# Altium PCB PCB1.PcbDoc (part 3 of 3)
Units mm, origin at the board's own origin, x right, y up, seen from the top; angles counter-clockwise.
Board outline 76.07 x 51.31 mm, 2 copper layers (Top Layer, Bottom Layer), stack 0.771 mm thick; 93 components, 68 nets, 330 pads, 277 vias.
Unrouted connection lines stored in the file: 4.
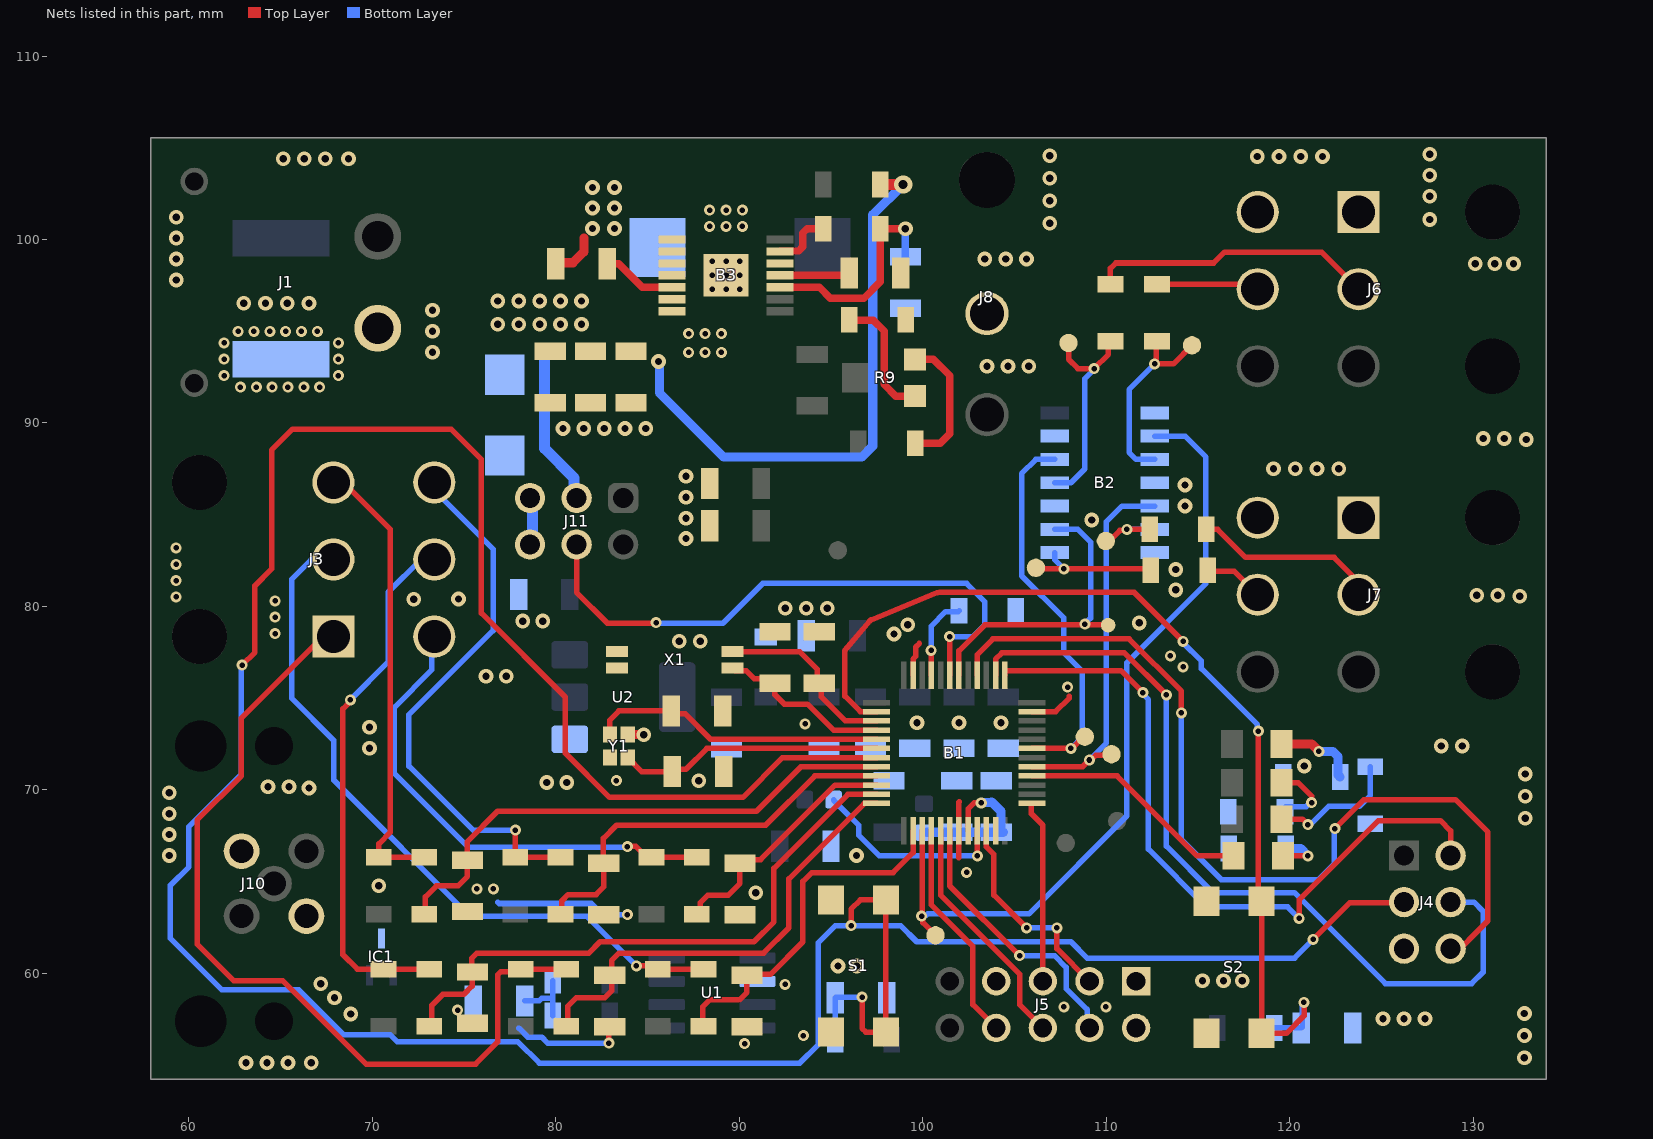
[diagram p2: the nets of this part, all layers, seen from the top]

## Via types
v1: diameter 0.8, hole 0.4, Top Layer to Bottom Layer, 148 vias
v2: diameter 0.6, hole 0.3, Top Layer to Bottom Layer, 124 vias
v3: diameter 5, hole 3.2, Top Layer to Bottom Layer, 4 vias
v4: diameter 1, hole 0.5, Top Layer to Bottom Layer, 1 vias

## Nets (pads, with @x,y where several pads share a name; then routed paths per layer and width w, separated by ;. In a path a pad name is that pad's centre, name@x,y a point inside that pad or via, vN(x,y) a via of type N, cw(c..) or ccw(c..) an arc to the next point about the centre after c; other vN are vias at no path point) (continued)
GND: B1.19 B1.23 B1.35 B1.47 B2.1 B2.4 B2.7 B2.10 B2.13 B3.5 B3.8 B3.9 B3.15 C1.2 C2.2 C3.2 C4.2 C5.2 C6.2 C7.2 C8.2 C9.2 C10.2 C11.2 C12.2 C13.2 C14.2 C15.2 C17.2 C18.2 C20.2 C21.2 C22.2 C23.2 C24.2 C25.2 C26.2 C27.2 C28.2 C29.2 C30.2 C31.2 C32.2 C33.2 C34.2 D1.2 D6.2 IC1.3 J1.1 J4.5 J5.1 J5.2 J5.7 J6.1 J6.4 J7.1 J7.4 J8.1 J10.1 J10.3 J11.5 J11.6 R1.1 R10.2 R11.1 R12.1 R13.1 R30.1 S1.1 S1.2 S2.1 S2.2 U1.2 U2.1 X1.2 X1.3 Y1.2 Y1.4 | length 24.3
  Top Layer w0.3: v2(82.9,56.2) 82.9,57.051 C28.2@82.948,57.099 ; Y1.4@83.926,73.027 Y1.4@83.939,73.013 ; v1@84.787,73.013 v1(84.8,73) ; B1.47@99.477,76.247 99.477,77.129 99.618,77.271 99.618,77.774 99.822,77.978 ; 101.977,66.294 B1.19@101.977,67.771 101.977,69.338 101.981,69.342 ; B1.35@105.965,74.259 107.253,74.259 108,75.006 108,75.1
  Top Layer w0.5: Y1.4@83.939,73.013 v1@84.787,73.013
  Bottom Layer w0.3: 76.835,63.881 76.91,63.806 81.944,63.806 82.55,63.2 v2(83.9,63.2) ; 77.993,57.008 78.486,56.515 79.248,56.515 79.563,56.2 v2(82.9,56.2)
  Bottom Layer w0.6: J11.6@78.74,83.566 J11.5@78.74,86.106
  other v1: 63.119,55.118 64.262,55.118 65.405,55.118 66.675,55.118 132.8,55.4 132.8,56.607 125.095,57.531 126.238,57.531 127.381,57.531 68.834,57.785 132.8,57.813 67.945,58.674 67.183,59.436 115.257,59.6 116.4,59.6 117.416,59.6 95.384,60.4 96.4,60.4 90.9,64.4 70.358,64.77 58.928,66.421 96.393,66.421 58.928,67.564 132.842,68.453 58.928,68.707 132.842,69.659 58.928,69.85 66.548,70.104 64.32,70.162 65.463,70.162 79.502,70.4 80.6,70.4 87.8,70.5 132.842,70.866 120.8,71.3 69.85,72.263 128.27,72.39 129.413,72.39 69.85,73.406 99.695,73.66 101.981,73.66 104.267,73.66 76.2,76.2 77.3,76.2 86.741,78.105 87.884,78.105 98.435,78.495 99.187,78.994 111.8,79.1 78.2,79.2 79.3,79.2 92.514,79.9 93.657,79.9 94.8,79.9 72.263,80.391 74.7,80.4 132.544,80.546 130.2,80.6 131.343,80.6 113.792,80.899 113.792,82.015 87.1,83.7 109.22,84.709 87.1,84.8 114.3,85.471 87.1,85.943 114.3,86.614 87.1,87.086 119.126,87.503 120.311,87.503 121.497,87.503 122.682,87.503 132.9,89.1 130.556,89.154 131.699,89.154 80.4,89.7 81.525,89.7 82.65,89.7 83.775,89.7 84.9,89.7 103.505,93.091 104.648,93.091 105.791,93.091 73.279,93.853 73.279,94.996 73.279,96.139 62.992,96.52 64.177,96.52 65.363,96.52 66.548,96.52 59.309,97.79 130.112,98.679 131.191,98.679 132.207,98.679 59.309,98.933 103.378,98.933 104.521,98.933 105.664,98.933 59.309,100.076 106.934,100.88 127.635,101.092 59.309,101.219 106.934,102.108 127.635,102.362 106.934,103.336 127.635,103.505 65.151,104.394 66.294,104.394 67.437,104.394 68.707,104.394 118.237,104.521 119.422,104.521 120.608,104.521 121.793,104.521 106.934,104.563 127.635,104.648
  other v2: 90.3,56.173 93.5,56.6 74.65,58 107.696,58.166 109.982,58.166 92.5,59.4 75.7,64.6 76.6,64.6 102.4,65.5 83.3,70.5 93.6,73.6 107.9,75.6 114.2,76.7 113.5,77.3 64.7,78.522 64.7,79.411 64.7,80.3 59.309,80.518 59.309,81.407 59.309,82.296 59.309,83.185 87.249,93.853 88.138,93.853 89.027,93.853 87.249,94.869 88.138,94.869 89.027,94.869 88.519,97.282 89.281,97.282 90.043,97.282 88.519,98.044 89.281,98.044 90.043,98.044 88.519,98.806 89.281,98.806 90.043,98.806 88.392,100.711 89.281,100.711 90.17,100.711 88.392,101.6 89.281,101.6 90.17,101.6
HSE_IN: B1.5 C8.1 Y1.1 | length 16.1
  Top Layer w0.3: Y1.1@82.952,73.027 82.952,73.808 83.444,74.3 C8.1@86.3,74.3 ; C8.1@86.412,74.363 86.625,74.151 87.049,74.151 88.441,72.759 96.553,72.759 B1.5@97.489,72.759
HSE_OUT: B1.6 C9.1 Y1.3 | length 14.3
  Top Layer w0.3: Y1.3@83.926,71.753 84.678,71.001 C9.1@86.35,71.001 ; C9.1@86.452,70.9 86.675,71.123 87.1,71.123 88.235,72.259 B1.6@97.489,72.259
JTAG_RESET: B1.7 C4.1 J4.3 R2.1 S1.3 S1.4 | length 173.7
  Top Layer w0.3: v2(62.9,76.8) 63.6,77.5 63.6,81.126 64.516,82.042 64.516,88.519 65.659,89.662 74.295,89.662 75.946,88.011 75.946,79.629 80.518,75.057 80.518,72.009 82.931,69.596 90.196,69.596 92.359,71.759 B1.7@97.489,71.759 ; v2(96.1,62.6) 96.1,63.5 96.6,64 S1.3@98,64 S1.4@98,56.8 96.9,56.8 96.7,57 v2(96.7,58.7) ; v2(121.285,61.849) 123.291,63.855 126.212,63.855 J4.3@126.238,63.881
  Bottom Layer w0.3: v2(62.9,76.8) 62.865,76.765 62.865,70.866 60,68.001 60,65.8 59,64.8 59,61.9 61.8,59.1 65.995,59.1 68.453,56.642 70.993,56.642 71.374,56.261 77.943,56.261 79.104,55.1 93.3,55.1 94.3,56.1 94.3,61.661 95.239,62.6 v2(96.1,62.6) 98.8,62.6 99.678,61.722 108.077,61.722 108.966,60.833 120.269,60.833 v2(121.285,61.849) ; R2.1@95.149,56.388 95.247,56.486 C4.1@95.247,58.674 95.273,58.7 v2(96.7,58.7)
JTAG_SWCLK: B1.38 J4.4 | length 45.5
  Top Layer w0.3: B1.38@103.977,76.247 103.977,77.129 104.318,77.47 110.998,77.47 v2(113.284,75.184)
  Bottom Layer w0.3: v2(113.284,75.184) 113.284,66.929 115.813,64.4 120.258,64.4 125.222,59.436 129.921,59.436 130.556,60.071 130.556,63.373 130.048,63.881 J4.4@128.778,63.881
JTAG_SWDIO: B1.37 J4.2 | length 39.4
  Top Layer w0.3: B1.37@104.477,76.247 104.477,76.5 110.8,76.5 v2(112,75.3) ; v2(120.523,62.992) 120.523,64.008 124.841,68.326 128.221,68.326 128.778,67.769 J4.2@128.778,66.421
  Bottom Layer w0.3: v2(112,75.3) 112,75.219 112.3,74.919 112.3,66.77 115.443,63.627 119.888,63.627 v2(120.523,62.992)
JTAG_SWO: B1.40 J4.6 | length 51.7
  Top Layer w0.3: B1.40@102.977,76.247 102.977,77.377 103.832,78.232 109.794,78.232 109.798,78.228 110.42,78.228 110.424,78.232 111.252,78.232 114.1,75.384 v2(114.1,74.2) ; v2(122.47,67.887) 124.051,69.469 129.032,69.469 130.81,67.691 130.81,62.865 J4.6@128.651,60.706 ; J4.6@128.132,61.341 J4.6@128.778,61.341
  Bottom Layer w0.3: v2(114.1,74.2) 114.1,67.282 116.282,65.1 121.569,65.1 122.428,65.959 122.428,67.846 v2(122.47,67.887)
LED_STRIP_1: J6.5 R26.1 | length 5.6
  Top Layer w0.3: R26.1@112.776,97.562 117.993,97.562 J6.5@118.264,97.291
LED_STRIP_2: J7.2 R28.2 | length 10.2
  Top Layer w0.3: R28.2@115.469,84.201 116.078,84.201 117.602,82.677 122.428,82.677 123.764,81.341 J7.2@123.764,80.636
LED_STRIP_3: J7.5 R29.2 | length 3.2
  Top Layer w0.3: R29.2@115.596,81.915 116.985,81.915 J7.5@118.264,80.636
LED_STRIP_4: J6.2 R27.2 | length 15.6
  Top Layer w0.3: R27.2@110.236,97.562 110.236,98.425 110.529,98.718 115.863,98.718 116.459,99.314 121.741,99.314 J6.2@123.764,97.291
LIGHT_BEAM: J3.6 R20.2 R21.1 | length 29.8
  Top Layer w0.3: v2(77.8,67.8) 77.8,66.62 77.973,66.447 R20.2@78.105,66.447 ; R20.2@78.105,66.32 R21.1@80.263,66.32 R21.1@80.391,66.32
  Bottom Layer w0.3: J3.6@73.379,86.759 73.64,86.498 73.64,86.06 76.581,83.119 76.581,78.681 72,74.1 72,71.3 75.5,67.8 v2(77.8,67.8)
LIGHT_BEAM_MCU: B1.9 C31.1 R21.2 | length 22
  Top Layer w0.3: R21.2@80.263,63.22 80.327,63.284 80.327,63.944 80.679,64.296 82.203,64.296 82.614,64.707 C31.1@82.614,65.995 ; C31.1@82.6,66.273 82.6,67.36 83.312,68.072 91.44,68.072 94.127,70.759 B1.9@97.489,70.759
LIGHT_BRAKE: J3.2 R24.2 R25.1 | length 39
  Top Layer w0.3: v2(84.4,60.4) 85.549,60.4 85.725,60.224 R25.1@88.011,60.224
  Bottom Layer w0.3: J3.2@67.879,82.559 66.684,82.559 65.6,81.475 65.6,75 67.9,72.7 67.9,70.53 75.33,63.1 81.7,63.1 v2(84.4,60.4)
LIGHT_BRAKE_MCU: B1.14 C33.1 R25.2 | length 19.7
  Top Layer w0.3: R25.2@88.011,57.124 88.011,58.166 88.392,58.547 90.012,58.547 90.424,58.959 90.424,59.947 91.697,59.947 93.472,61.722 93.472,65.007 93.959,65.494 98.387,65.494 99.477,66.584 B1.14@99.477,67.771
LIGHT_HAZARD: J3.3 R16.2 R17.1 | length 24.9
  Top Layer w0.3: J3.3@67.879,86.759 68.435,86.759 70.993,84.201 70.993,67.691 70.358,67.056 R16.2@70.358,66.32 R17.1@72.898,66.32
LIGHT_HAZARD_MCU: B1.8 C29.1 R17.2 | length 29.3
  Top Layer w0.3: R17.2@72.898,63.22 72.898,64.168 73.5,64.77 74.676,64.77 75.185,65.279 C29.1@75.185,66.17 ; C29.1@75.184,66.447 75.184,67.184 76.834,68.834 90.932,68.834 93.357,71.259 B1.8@97.489,71.259
LIGHT_LEFT_INDICATOR: J3.1 R14.2 R15.1 | length 47.3
  Top Layer w0.3: J3.1@67.879,78.359 67.31,78.359 62.865,73.914 62.865,70.765 60.449,68.349 60.449,61.598 62.447,59.6 65.114,59.6 69.661,55.053 75.627,55.053 76.838,56.264 76.838,59.921 77.014,60.097 R14.2@78.088,60.097 ; R14.2@78.088,60.224 R15.1@80.58,60.224 R15.1@80.645,60.224
LIGHT_LEFT_INDICATOR_MCU: B1.12 C28.1 R15.2 | length 24.8
  Top Layer w0.3: R15.2@80.645,57.124 80.645,58.199 81.12,58.674 82.677,58.674 83.058,59.055 C28.1@83.058,59.947 ; C28.1@82.931,60.224 83,60.224 83.048,60.272 83.048,60.696 83.452,61.1 91.326,61.1 92.71,62.484 92.71,65.151 96.818,69.259 B1.12@97.489,69.259
LIGHT_POSITION: J3.4 R22.2 R23.1 | length 26.6
  Top Layer w0.3: v2(83.9,66.9) 83.92,66.92 84.365,66.92 84.965,66.32 R22.2@85.215,66.32 ; R22.2@85.598,66.32 R23.1@87.884,66.32
  Bottom Layer w0.3: J3.4@73.379,78.359 73.252,78.232 73.252,76.554 71.2,74.502 71.2,70.9 75.236,66.864 83.864,66.864 v2(83.9,66.9)
LIGHT_POSITION_MCU: B1.10 C32.1 R23.2 | length 13.6
  Top Layer w0.3: R23.2@87.884,63.22 87.884,63.854 88.292,64.262 89.408,64.262 90.043,64.897 90.043,66.043 90.197,66.197 91.167,66.197 95.23,70.259 B1.10@97.489,70.259
LIGHT_RIGHT_INDICATOR: J3.5 R18.2 R19.1 | length 28.7
  Top Layer w0.3: v2(68.8,74.9) 68.8,74.819 68.4,74.419 68.4,61.013 69.189,60.224 R18.2@70.612,60.224 R19.1@72.771,60.224
  Bottom Layer w0.3: v2(68.8,74.9) 70.866,76.966 70.866,80.772 72.653,82.559 J3.5@73.379,82.559
LIGHT_RIGHT_INDICATOR_MCU: B1.11 C30.1 R19.2 | length 32.8
  Top Layer w0.3: R19.2@73.104,57.124 73.246,57.265 73.246,58.26 73.845,58.859 74.999,58.859 75.438,59.297 75.438,59.889 C30.1@75.253,60.074 ; C30.1@75.253,60.224 75.428,60.399 75.428,60.823 75.692,61.087 81.788,61.087 82.423,61.722 90.805,61.722 91.885,62.801 91.885,65.722 95.921,69.759 B1.11@97.489,69.759
LOGIC_LEVEL_1: B1.15 B2.2 pad.4@100.699,62.075 | length 44.1
  Top Layer w0.3: B1.15@99.977,67.771 99.977,63.147 v2(99.949,63.119) 100.006,63.062 100.006,62.767 pad.4@100.699,62.075
  Bottom Layer w0.3: v2(99.949,63.119) 100.006,63.176 100.205,63.176 100.275,63.246 105.791,63.246 111.125,68.58 111.125,76.925 115.443,81.243 115.443,88.138 114.3,89.281 B2.2@112.649,89.281
LOGIC_LEVEL_2: B1.29 B2.5 pad.4@110.296,71.942 | length 21
  Top Layer w0.3: B1.29@105.965,71.259 108.719,71.259 v2@109.088,71.628 ; v2(109.093,71.628) 109.174,71.628 109.421,71.875 110.229,71.875 pad.4@110.296,71.942
  Bottom Layer w0.3: v2(109.093,71.628) 110.02,72.555 110.02,84.62 110.871,85.471 B2.5@112.649,85.471
LOGIC_LEVEL_3: B1.42 B2.9 pad.4@110.109,78.978 | length 16.9
  Top Layer w0.3: B1.42@101.977,76.247 101.977,77.582 103.389,78.994 108.793,78.994 108.816,79.017 v2(108.839,79.04) ; v2@108.839,78.994 110.109,78.994 pad.4@110.109,78.978
  Bottom Layer w0.3: B2.9@107.199,84.201 108.458,84.201 109.151,83.508 109.151,79.366 108.839,79.055 v2(108.839,79.04)
LOGIC_LEVEL_4: B1.31 B2.12 pad.4@108.839,72.898 | length 21.9
  Top Layer w0.3: B1.31@105.965,72.259 108.073,72.259 v2(108.077,72.263) 108.14,72.263 108.775,72.898 pad.4@108.839,72.898
  Bottom Layer w0.3: B2.12@107.199,88.011 106.172,88.011 105.4,87.239 105.4,81.671 107.696,79.375 107.696,77.47 108.712,76.454 108.712,72.898 v2(108.077,72.263)
LSE_IN: B1.3 C6.1 X1.1 | length 10.2
  Top Layer w0.3: X1.1@89.637,77.539 93.289,77.539 94.262,76.565 94.262,75.915 C6.1@94.361,75.816 ; C6.1@94.234,75.816 94.478,75.572 94.478,75.067 95.786,73.759 B1.3@97.489,73.759
LSE_OUT: B1.4 C7.1 X1.4 | length 9.7
  Top Layer w0.3: X1.4@89.637,76.639 89.787,76.489 90.389,76.489 90.824,76.054 91.71,76.054 C7.1@91.948,75.816 ; C7.1@91.948,75.943 91.948,75.184 92.456,74.676 93.726,74.676 95.143,73.259 B1.4@97.489,73.259
MCU_LED: B1.28 D3.1 | length 12.8
  Top Layer w0.3: B1.28@105.965,70.759 110.597,70.759 114.956,66.4 D3.1@116.95,66.4
NetB1_45: B1.45 R1.2 | length 4.5
  Top Layer w0.3: v2(100.457,77.597) 100.477,77.577 B1.45@100.477,76.247
  Bottom Layer w0.3: v2(100.457,77.597) 100.457,78.913 101.257,79.713 101.938,79.713 R1.2@101.981,79.756
NetB2_3: B2.3 pad.4@114.681,94.234 R26.2 | length 10.7
  Top Layer w0.3: R26.2@112.776,94.462 112.73,94.416 112.73,93.38 112.649,93.299 v2(112.649,93.218) 113.665,93.218 pad.4@114.681,94.234
  Bottom Layer w0.3: B2.3@112.649,88.011 111.633,88.011 111.252,88.392 111.252,91.821 v2(112.649,93.218)
NetB2_6: B2.6 pad.4@109.982,83.566 R28.1 | length 4.2
  Top Layer w0.3: pad.4@109.982,83.566 110.17,83.566 110.748,84.144 111.068,84.144 v2(111.125,84.201) R28.1@112.369,84.201
  Bottom Layer w0.3: v2(111.125,84.201) B2.6@112.649,84.201
NetB2_8: B2.8 pad.4@106.172,82.105 R29.1 | length 7.5
  Top Layer w0.3: pad.4@106.172,82.105 106.299,82.042 112.369,82.042 R29.1@112.496,81.915
  Bottom Layer w0.3: B2.8@107.199,82.931 107.188,82.92 107.188,82.55 v2(107.696,82.042)
NetB2_11: B2.11 pad.4@107.95,94.361 R27.1 | length 12
  Top Layer w0.3: pad.4@107.95,94.361 107.95,93.472 108.458,92.964 v2(109.347,92.964) 110.121,93.738 110.121,94.347 R27.1@110.236,94.462
  Bottom Layer w0.3: B2.11@107.199,86.741 108.077,86.741 108.839,87.503 108.839,92.411 109.347,92.919 v2(109.347,92.964)
NetC18_1: C18.1 R4.1 R5.1 | length 3.5
  Bottom Layer w0.3: C18.1@78.3,58.5 79.1,58.5 79.25,58.65 79.85,58.65 ; R5.1@79.85,57.7 79.85,58.65 ; R4.1@79.85,59.6 79.85,58.65
NetD2_2: D2.2 R11.2 | length 4.4
  Top Layer w0.5: D2.2@119.65,72.5 121.2,72.5 v2(121.6,72.1)
  Bottom Layer w0.5: v2(121.6,72.1) 122.354,72.1 122.646,71.807 122.646,70.804 R11.2@122.75,70.7
NetD3_2: D3.2 R12.2 | length 2.7
  Top Layer w0.3: D3.2@119.65,66.4 v2(121,66.4)
  Bottom Layer w0.5: R12.2@119.787,66.802 120.598,66.802 v2(121,66.4)
NetD4_2: D4.2 R13.2 | length 3.8
  Top Layer w0.3: D4.2@119.55,70.4 120.459,70.4 121.2,69.659 v2(121.2,69.3)
  Bottom Layer w0.3: R13.2@119.787,69.088 120.907,69.088 121.119,69.3 v2(121.2,69.3)
NetD5_2: D5.2 R30.2 | length 7.2
  Top Layer w0.3: D5.2@119.55,68.4 120.7,68.4 v2(121,68.1)
  Bottom Layer w0.3: v2(121,68.1) 121.131,68.1 122.131,69.1 123.8,69.1 124.4,69.7 R30.2@124.4,71.25
NetR7_2: R7.2 R9.3 | length 7.5
  Top Layer w0.4: R9.3@99.59,93.456 100.063,93.472 100.584,93.472 101.473,92.583 101.473,89.408 100.965,88.9 R7.2@99.594,88.9
NetR9_1: R9.1 R10.1 | length 7.2
  Top Layer w0.4: R10.1@95.986,95.885 95.986,95.857 96.236,95.607 97.306,95.607 97.9,95.013 97.9,92.092 98.536,91.456 R9.1@99.59,91.456
PB0: B1.16 J5.8 | length 12.2
  Top Layer w0.3: B1.16@100.477,67.771 100.477,63.734 102.743,61.468 102.743,58.293 J5.8@104.013,57.023
PB1: B1.17 J5.6 | length 13.1
  Top Layer w0.3: B1.17@100.977,67.771 100.977,64.261 105.283,59.955 105.283,58.293 J5.6@106.553,57.023
PB2: B1.18 J5.4 | length 15
  Top Layer w0.3: B1.18@101.477,67.771 101.477,64.766 v2(105.283,60.96)
  Bottom Layer w0.3: v2(105.283,60.96) 107.188,60.96 107.823,60.325 107.823,59.171 108.966,58.028 108.966,57.15 J5.4@109.093,57.023
PB6: B1.43 J11.4 | length 32.4
  Top Layer w0.3: J11.4@81.138,83.371 81.138,80.761 82.818,79.082 85.432,79.082 v2(85.471,79.121) ; v2(101.473,78.359) 101.477,78.355 B1.43@101.477,76.247
  Bottom Layer w0.3: v2(85.471,79.121) 85.51,79.082 89.115,79.082 91.283,81.25 102.392,81.25 103.378,80.264 103.378,78.994 102.743,78.359 v2(101.473,78.359)
PG: B3.6 R8.1 | length 3.3
  Top Layer w0.4: B3.6@92.219,99.344 92.244,99.369 93.238,99.369 93.472,99.603 93.472,100.35 93.706,100.584 R8.1@94.589,100.584
SS: B3.4 C22.1 | length 3.4
  Top Layer w0.4: B3.4@92.219,98.044 C22.1@95.661,98.044
SW: B3.10 B3.11 C16.2 L3.1 | length 2.5
  Top Layer w0.5: C16.2@80.007,98.679 80.062,98.734 80.934,98.734 81.534,99.334 81.534,100.076
  other v1: 82,100.6 83.2,100.6 82,101.716 83.2,101.716 82,102.832 83.2,102.832
TEST: B1.2 C5.1 R3.1 S2.3 S2.4 | length 54.8
  Top Layer w0.3: B1.2@97.489,74.259 96.607,74.259 95.758,75.108 95.758,77.593 97.102,79.187 97.153,79.239 97.208,79.261 100.804,80.749 100.919,80.772 111.528,80.772 v2(114.2,78.1) ; v2(118.3,73.2) 118.3,64.092 118.491,63.901 118.491,56.749 S2.4@118.467,56.725 119.825,56.725 120.8,57.7 120.8,58.397 v2(120.777,58.42)
  Bottom Layer w0.3: v2(114.2,78.1) 114.2,78.019 115.186,77.032 115.186,76.614 118.243,73.557 118.243,73.257 v2(118.3,73.2) ; R3.1@119.152,57.023 C5.1@120.647,57.023 120.681,57.057 120.681,58.324 v2(120.777,58.42)
UART_RX: B1.25 J5.5 | length 9.9
  Top Layer w0.3: B1.25@105.965,69.205 105.918,69.158 105.918,68.707 106.553,68.072 J5.5@106.553,59.563
UART_TX: B1.22 J5.3 | length 11.5
  Top Layer w0.3: B1.22@103.477,67.771 103.477,66.889 103.885,66.48 103.885,64.263 v2(105.664,62.484) ; v2(107.315,62.484) 107.315,61.341 J5.3@109.093,59.563
  Bottom Layer w0.3: v2(105.664,62.484) v2(107.315,62.484)
VBST: B3.12 C16.1 | length 4.1
  Top Layer w0.4: C16.1@82.807,98.679 83.439,98.679 84.724,97.394 B3.12@86.343,97.394
VDDA: B1.21 L2.1 | length 10.8
  Top Layer w0.3: v2(102.978,66.398) B1.21@102.977,67.771
  Bottom Layer w0.3: L2.1@95.146,69.469 95.146,69.434 95.446,69.134 95.45,69.134 96.52,68.064 96.52,67.519 97.641,66.398 v2(102.978,66.398)
VIN: B3.13 B3.14 C20.1 C21.1 C26.1 D1.1 F1.2 J11.3 R6.2 | length 39.9
  Top Layer w0.6: R6.2@97.689,103.147 97.839,102.997 v4(98.933,102.997)
  Bottom Layer w0.5: v1(85.598,93.345) 85.647,93.296 85.647,91.645 89.154,88.138 96.677,88.138 97.282,88.743 97.282,101.346 v4(98.933,102.997)
  Bottom Layer w0.6: 79.4,93.824 79.4,88.6 80.994,87.006 80.994,86.055 J11.3@81.138,85.911
  other v1: 76.835,95.377 77.978,95.377 79.121,95.377 80.264,95.377 81.407,95.377 76.835,96.647 77.978,96.647 79.121,96.647 80.264,96.647 81.407,96.647
  other v2: 62.814,91.948 63.678,91.948 64.541,91.948 65.405,91.948 66.269,91.948 67.132,91.948 61.925,92.583 68.148,92.583 61.925,93.472 68.148,93.472 61.925,94.361 68.148,94.361 62.687,94.996 63.551,94.996 64.414,94.996 65.278,94.996 66.142,94.996 67.005,94.996
VREF: B1.20 C1.1 C2.1 L1.1 | length 8.5
  Top Layer w0.3: B1.20@102.477,67.771 102.477,68.959 102.803,69.285 v2(103.194,69.285)
  Bottom Layer w0.5: L1.1@100.223,67.688 C2.1@102.108,67.688 ; C2.1@102.235,67.688 C1.1@104.394,67.688 ; v2(103.194,69.285) 103.213,69.304 103.721,69.304 103.759,69.342 104.267,68.834 C1.1@104.267,67.688
VREG: B3.3 C23.1 R8.2 | length 11.9
  Top Layer w0.4: B3.3@92.219,97.394 94.376,97.394 94.97,96.8 96.8,96.8 97.689,97.689 R8.2@97.689,100.584 v1(99.06,100.584)
  Bottom Layer w0.4: C23.1@99.06,99.063 v1(99.06,100.584)
pads on no net: B1.13 B1.30 B1.32 B1.39 B1.41 B1.44 B1.46 J1.3 J1.4 J3. J6. J7. J8. J10.2 J10.6 J10.7 J10.8 J10.9 U1.5 U1.8
copper on no net:
  other v3: 110.871,63.881 75.681,72.771 75.681,102.108 110.871,102.108

## Polygon pours and split planes (outlines as drawn)
GND on Top Layer "GND_L01_P271" (solid, remove dead copper, pour order 271): 133.985,105.801 57.7,105.537 57.7,54.102 133.985,54.102
no net on Top Layer "NONET_L01_P259" (solid, pour order 259): 78.359,87.122 78.359,85.471
no net on Top Layer "NONET_L01_P258" (solid, pour order 258): 80.899,96.52 84.074,96.52
VIN on Top Layer "VIN_L01_P262" (solid, pour order 262): 87.361,97.774 75.835,97.774 75.819,97.79 75.763,97.734 75.763,92.781 86.233,92.781 86.233,95.631 87.374,95.631
SW on Top Layer "SW_L01_P260" (solid, remove dead copper, pour order 260): 87.122,97.79 87.122,98.933 85.206,98.933 84.074,100.711 84.074,103.505 81.28,103.505 81.28,99.695 83.566,99.695 84.961,97.79
GND on Top Layer "GND_L01_P279" (solid, pour order 279): 75.311,91.567 82.423,91.567 82.423,87.249 75.311,87.249
+5V on Top Layer "+5V_L01_P267" (solid, pour order 267): 103.378,87.488 115.951,92.665 115.951,95.377 128.651,95.377 128.651,76.602 125.476,76.514 125.476,89.154 117.094,89.154 103.378,83.316
+5V on Top Layer "+5V_L01_P265" (solid, pour order 265): 128.651,78.5 115.951,78.5 115.951,74.549 128.651,74.549
+5V on Top Layer "+5V_L01_P270" (solid, pour order 270): 90.043,87.965 90.043,81.026 97.276,81.026 103.628,83.421 103.759,87.632 96.86,84.709 93.853,84.709 93.853,88.08
+5V on Top Layer "+5V_L01_P268" (solid, pour order 268): 91.313,96.393 93.091,96.393 93.091,94.996 92.71,94.996 92.71,91.567 95.123,91.567 95.123,89.789 97.028,89.789 97.028,87.865 90.043,87.865 90.043,95.123
VIN on Top Layer "VIN_L01_P264" (solid, pour order 264): 61.341,95.504 68.6,95.504 68.6,91.186 61.341,91.186
+12V on Top Layer "+12V_L01_P269" (solid, pour order 269): 61.021,102.61 72.263,102.61 72.263,97.817 61.092,97.817 61.087,98.171
GND on Bottom Layer "GND_L02_P278" (solid, remove dead copper, pour order 278): 57.7,105.594 133.85,105.728 134.114,53.962 57.7,54.229
SW on Bottom Layer "SW_L02_P263" (solid, pour order 263): 81.407,103.505 87.376,103.505 87.376,97.536 82.677,97.536 82.677,98.425 81.407,98.425
+3V3 on Bottom Layer "+3V3_L02_P276" (solid, pour order 276): 92.837,75.629 92.837,70.1 94.106,70.1 94.107,68.8 92.837,68.8 92.837,65.913 91.565,65.913 91.725,75.073
+3V3 on Bottom Layer "+3V3_L02_P274" (solid, pour order 274): 79.629,75.946 85.471,75.946 85.471,77.089 87.757,77.089 87.757,75.692 87.757,73.025 85.471,73.025 85.471,74.168 79.629,74.168
+12V on Bottom Layer "+12V_L02_P272" (solid, pour order 272): 72.3,102.87 61.341,102.87 61.341,97.599 72.3,97.599
VIN on Bottom Layer "VIN_L02_P273" (solid, pour order 273): 68.6,95.405 68.6,92.456 76.1,92.456 76.1,95.405 78.35,95.405 78.35,90 61.475,90 61.475,95.405
VIN on Bottom Layer "VIN_L02_P266" (solid, pour order 266): 76.1,97.79 82.224,97.79 82.224,93.218 76.1,93.218
+5V on Bottom Layer "+5V_L02_P275" (solid, pour order 275): 96.393,101.473 96.393,88.9 89.916,88.9 89.916,94.615 92.456,94.615 92.456,101.473
+3V3 on Bottom Layer "+3V3_L02_P277" (solid, pour order 277): 87.044,75.6 105.41,75.6 105.41,74.55 87.277,74.55

## Other copper
Top Layer:
  pour cut-out: 82.206,66.39 83.496,67.679 90.793,67.679 90.793,66.732 90.781,66.72 88.943,66.72 88.943,65.962 89.635,65.27 89.239,64.874 89.239,64.67 88.239,64.67 87.489,63.92 82.206,63.92
  pour cut-out: 76.726,68.426 83.122,68.426 83.122,67.222 82,65.6 75.592,65.6 75.592,67.292
  pour cut-out: 102.904,68.809 102.979,68.735 103.303,68.735 103.277,68.708 102.885,68.708
  pour cut-out: 100.923,77.909 101,77.985 101.069,77.985 101.069,77.184 100.885,77.184
  pour cut-out: 77.246,59.524 77.538,59.816 81.238,59.816 81.53,59.524 80.237,58.231 80.237,57.031 79.63,56.424 78.646,56.424 77.246,57.824
  pour cut-out: 97.05,65.05 97.2,65.2 97.2,65.5 98.97,65.5 99.399,65.929 99.399,63.01 97.11,63.01 97.05,62.95
  pour cut-out: 89.126,60.812 91.614,60.812 91.614,60.841 93.057,62.284 93.064,62.277 93.064,61.891 92.779,61.891 89.843,58.955 89,58.955 89,60.685
  pour cut-out: 106.902,69.351 108.184,69.351 108.184,69.287 107.392,68.494 107.392,67.343 106.774,66.726 106.326,67.174 106.326,68.909
  pour cut-out: 83.5,74.1 85.43,74.1 85.932,73.598 87.025,73.598 88.024,72.599 87.101,71.676 85.892,71.676 85.625,71.409 84.847,71.409 83.5,72.756
  pour cut-out: 120.4,69.883 120.463,69.883 121.512,68.834 121.466,68.788 121.466,68.412 120.796,68.412 120.4,68.808
  pour cut-out: 116,73.5 120.4,73.5 120.4,65.8 120.5,65.7 120.5,65.4 116.1,65.4 116,65.5
  pour cut-out: 93.706,96.935 94.186,96.935 94.806,96.315 95.511,96.315 96.686,95.14 96.694,95.148 97.116,95.148 97.9,94.364 97.9,91.5 97.994,91.406 97.34,91.406 97.34,93.506 95.77,93.506 94.822,94.454 94.447,94.454 94.447,96.194
  pour cut-out: 81.53,59.524 81.53,60.679 81.888,60.679 82.677,61.468 82.831,61.314 83.089,61.314 83.089,59.34 82.931,59.182 81.534,59.182 81.534,59.055
  pour cut-out: 69.712,63.92 69.673,63.881 68.804,63.881 68.804,61.49 69.662,60.632 71.588,60.632 72.696,59.524 74.358,59.524 74.358,59.349 74.276,59.267 75.135,59.267 75.135,60.802 75.318,60.986 71.588,61.2 70.141,62.52
  pour cut-out: 102.863,63.974 104.07,63.974 105.714,62.103 105.714,60.125 105.666,60.077 102.896,62.848 102.809,62.848
  pour cut-out: 90.805,67.691 90.781,67.667 90.781,66.72 94.412,70.351 94.279,70.485 93.726,70.485
  pour cut-out: 110.009,73.506 110.934,72.58 109.521,71.167 107.014,71.167 106.553,71.628 108.431,73.506
  pour cut-out: 91.143,65.27 91.694,65.27 95.504,69.85 94.897,70.259 90.362,66.043
  pour cut-out: 90.487,77.131 93.12,77.131 93.98,76.2 94.361,74.549 92.625,75.084 90.487,77.027
  pour cut-out: 104.47,68.708 105.028,68.708 105.028,68.909 105.51,68.909 105.63,68.419 106.145,67.903 106.145,60.511 105.733,60.192 105.66,64.164 103.885,65.983 103.886,67.056 104.483,67.056
  pour cut-out: 104.827,77.184 104.827,76.655 111.076,76.655 112.251,75.48 112.411,75.48 110.702,77.189
  pour cut-out: 80.934,99.533 82.182,99.533 82.182,97.936 80.934,97.936
Bottom Layer:
  pour cut-out: 80.55,59.947 80.685,60.081 80.85,60.081 82.366,58.566 82.25,56.75 80.55,56.75
  pour cut-out: 83.65,56.75 83.65,57.973 83.769,58.092 85.008,58.092 85.1,58 85.1,56.75
  pour cut-out: 120.891,67.55 121.306,67.55 121.62,67.863 121.777,67.706 121.95,67.706 121.95,66.199 122.02,66.128 121.4,65.508 119.108,65.508 119.1,65.5 119.087,65.513 119.087,65.852 121.107,65.852 120.831,66.129 120.831,67.248
  pour cut-out: 86.959,56.467 90.079,56.467 90.1,56.488 90.1,58 88.3,58 87.3,59 86.8,59 86.8,56.5
  pour cut-out: 63.4,64 65.7,64 65.7,61.7 65.9,61.5 63.4,61.5
  pour cut-out: 105.808,86.839 105.924,86.723 106.174,86.723 106.174,82.331 107.253,82.331 108.495,83.572 108.728,83.339 108.743,83.339 108.743,79.59 108.531,79.379 108.269,79.379 105.808,81.84
  pour cut-out: 78.4,92.912 79.322,92.912 79.365,92.869 79.365,89.703 78.4,89.742
  pour cut-out: 112.703,74.332 112.853,74.332 113.03,74.155 113.03,66.675 112.649,66.675 112.522,66.548

## Silkscreen, mask and mechanical layers (free items; w line width, h text height)
Top Overlay:
  text "GND" at 122.555,99.187 h0.7
  text "GND" at 117.221,99.06 h0.7
  text "+12V" at 70.954,97.654 h0.7
  text "STRIP1" at 116.586,94.869 h0.7
  text "STRIP4" at 122.301,94.869 h0.7
  text "GND" at 105.029,94.488 h0.7
  text "GND" at 71.654,92.454 h0.7
  text "TP10_STRIP1" at 110.75,91.75 h0.6
  text "TP9_STRIP4" at 104.45,91.65 h0.6
  text "+5V" at 117.978,90.645 h0.7
  text "+5V" at 122.936,90.551 h0.7
  text "+5V" at 105.156,89.281 h0.7
  text "BEAM" at 73.152,88.519 h0.7
  text "HAZARD" at 67.183,88.392 h0.7
  text "GND" at 77.47,87.63 h0.7
  text "+12V" at 79.883,87.63 h0.7
  text "+5V" at 82.804,87.63 h0.7
  text "BRAKE" at 67.183,84.201 h0.7
  text "RI" at 73.449,84.213 h0.7
  text "TP8_STRIP2" at 103.25,83.35 h0.6
  text "TP11_5V" at 96.75,82.95 h0.6
  text "GND" at 117.475,82.423 h0.7
  text "GND" at 123.063,82.423 h0.7
  text "GND" at 77.597,80.899 h0.7
  text "PB6" at 80.391,80.899 h0.7
  text "+5V" at 83.185,80.899 h0.7
  text "TP7_STRIP3" at 101.25,80.85 h0.6
  text "LI" at 68.58,80.137 h0.7
  text "POS" at 73.152,80.137 h0.7
  text "TP5_LL3" at 108.15,79.75 h0.6
  text "STRIP3" at 116.713,78.359 h0.7
  text "STRIP2" at 122.047,78.359 h0.7
  text "+5V" at 118.177,74.31 h0.7
  text "+5V" at 122.555,74.168 h0.7
  text "TP1_LL4" at 107.25,73.65 h0.6
  text "PWR" at 113.154,72.254 h0.7
  text "TP2_LL2" at 106.95,70.45 h0.6
  text "CAN_TX" at 111.954,70.271 h0.7
  text "CAN_RX" at 111.854,68.671 h0.7
  text "GND" at 61.954,68.454 h0.7
  text "+3.3V" at 124.333,67.818 h0.7
  text "SWDIO" at 128.143,67.691 h0.7
  text "TP4_CAN_TX" at 108.649,67.06 h0.6
  text "MCU" at 113.754,65.654 h0.7
  text "SWCLK" at 129.54,64.77 h0.7
  text "CANL" at 60.154,64.654 h0.7
  text "RST" at 123.317,64.389 h0.7
  text "TP6_LL1" at 100.85,62.85 h0.6
  text "TP3_CAN_RX" at 107,62.7 h0.6 r90
  text "GND" at 123.444,62.103 h0.7
  text "SWO" at 129.794,61.849 h0.7
  text "GND" at 67.446,61.446 h0.7 r180
  text "GND" at 103.505,61.087 h0.7
  text "RX" at 106.045,61.087 h0.7
  text "TX" at 108.204,61.087 h0.7
  text "CANH" at 61.354,60.754 h0.7
  text "GND" at 114.046,57.15 h0.7 r90
  text "+3.3V" at 99.949,56.769 h0.7 r90
  text "RESET" at 93.218,54.864 h0.7
  text "TEST" at 115.062,54.864 h0.7
  text "PB0" at 102.997,54.737 h0.7
  text "PB1" at 105.537,54.737 h0.7
  text "PB2" at 107.95,54.737 h0.7
Bottom Overlay:
  drawing of 17 lines, arcs and shapes, not listed
  text "GND" at 119.253,99.06 h0.7
  text "GND" at 124.587,99.06 h0.7
  text "+12V" at 71.755,97.79 h0.7
  text "STRIP1" at 119.888,94.869 h0.7
  text "STRIP4" at 125.476,94.742 h0.7
  text "GND" at 102.108,93.853 h0.7
  text "GND" at 71.501,92.71 h0.7
  text "+5V" at 124.714,90.678 h0.7
  text "+5V" at 119.507,90.551 h0.7
  text "+5V" at 101.854,89.916 h0.7
  text "HAZARD" at 69.469,88.392 h0.7
  text "BEAM" at 74.803,88.265 h0.7
  text "+5V" at 85.146,87.154 h0.7
  text "GND" at 77.246,87.046 h0.7 r90
  text "+12V" at 82.146,87.054 h0.7
  text "BRAKE" at 69.469,84.201 h0.7
  text "RI" at 73.787,84.201 h0.7
  text "GND" at 77.146,84.046 h0.7 r90
  text "Lightning Control Unit LCU" at 105.21,83.745 h0.7
  text "Eng. Dawid Pisarczyk" at 102.289,82.475 h0.7
  text "GND" at 119.253,82.423 h0.7
  text "GND" at 124.714,82.296 h0.7
  text "PB6" at 82.046,81.554 h0.7
  text "+5V" at 84.946,81.454 h0.7
  text "16.11.2025" at 98.098,81.226 h0.7
  text "LI" at 68.199,80.264 h0.7
  text "POS" at 74.168,80.137 h0.7
  text "STRIP3" at 120.269,78.232 h0.7
  text "STRIP2" at 125.857,78.105 h0.7
  text "+5V" at 119.761,74.041 h0.7
  text "+5V" at 124.841,74.041 h0.7
  text "GND" at 63.446,68.354 h0.7
  text "3.3V" at 124.714,66.04 h0.7
  text "SWDIO" at 133.477,66.04 h0.7
  text "CANL" at 62.546,64.554 h0.7
  text "RST" at 124.714,63.627 h0.7
  text "SWCLK" at 133.477,63.5 h0.7
  text "GND" at 124.714,61.087 h0.7
  text "CANH" at 64.246,60.954 h0.7
  text "GND" at 67.246,60.954 h0.7
  text "SWO" at 132.207,60.96 h0.7
  text "TX" at 109.601,60.833 h0.7
  text "RX" at 107.061,60.706 h0.7
  text "GND" at 104.902,60.579 h0.7
  text "+3.3V" at 100.33,59.817 h0.7 r90
  text "GND" at 113.721,59.202 h0.7 r90
Mechanical 1:
  lines w0.254: 133.858,54.229 133.985,54.229 121.444,54.229 83.407,54.229 57.912,54.229 57.912,105.537 133.912,105.537 ; 133.985,54.237 133.985,105.537

## Dimensions
133.985,54.229 to 133.912,105.537 on Mechanical 1
57.912,105.537 to 133.912,105.537 on Mechanical 1

## Text inside footprints (layer, text, board x,y; h text height)
J3: Top 3D Body "NPTH D3.00 +/- 0.05" at 75.429,89.459 h0.5 r270; Top 3D Body "PTH D1.80 +/- 0.05" at 76.186,89.459 h0.5 r270
J6: Top 3D Body "PTH D1.80 +/- 0.05" at 115.457,90.391 h0.5 r90; Top 3D Body "NPTH D3.00 +/- 0.05" at 116.214,90.391 h0.5 r90